# Altium PCB BB-ADC.PcbDoc
Units mm, origin at the board's own origin, x right, y up, seen from the top; angles counter-clockwise.
Board outline 35.05 x 55.12 mm, 2 copper layers (Top Layer, Bottom Layer); 11 components, 13 nets, 110 pads, 3 vias.
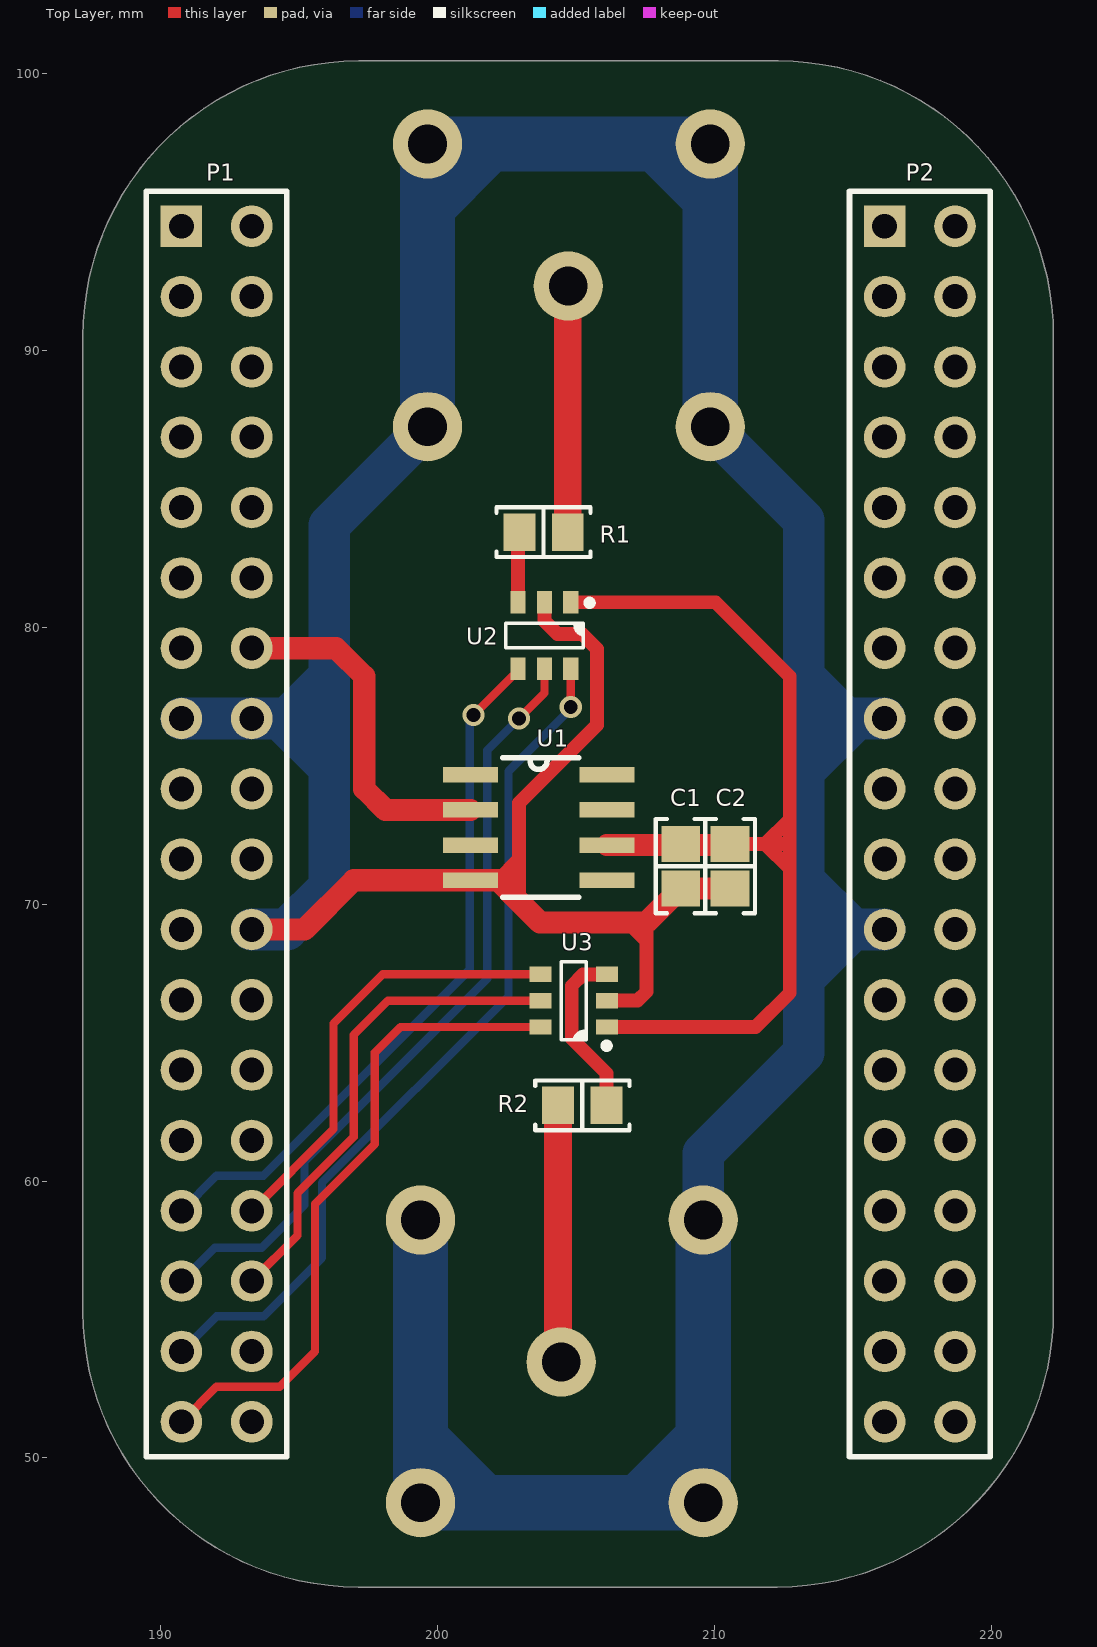
[diagram p0: Top Layer view]
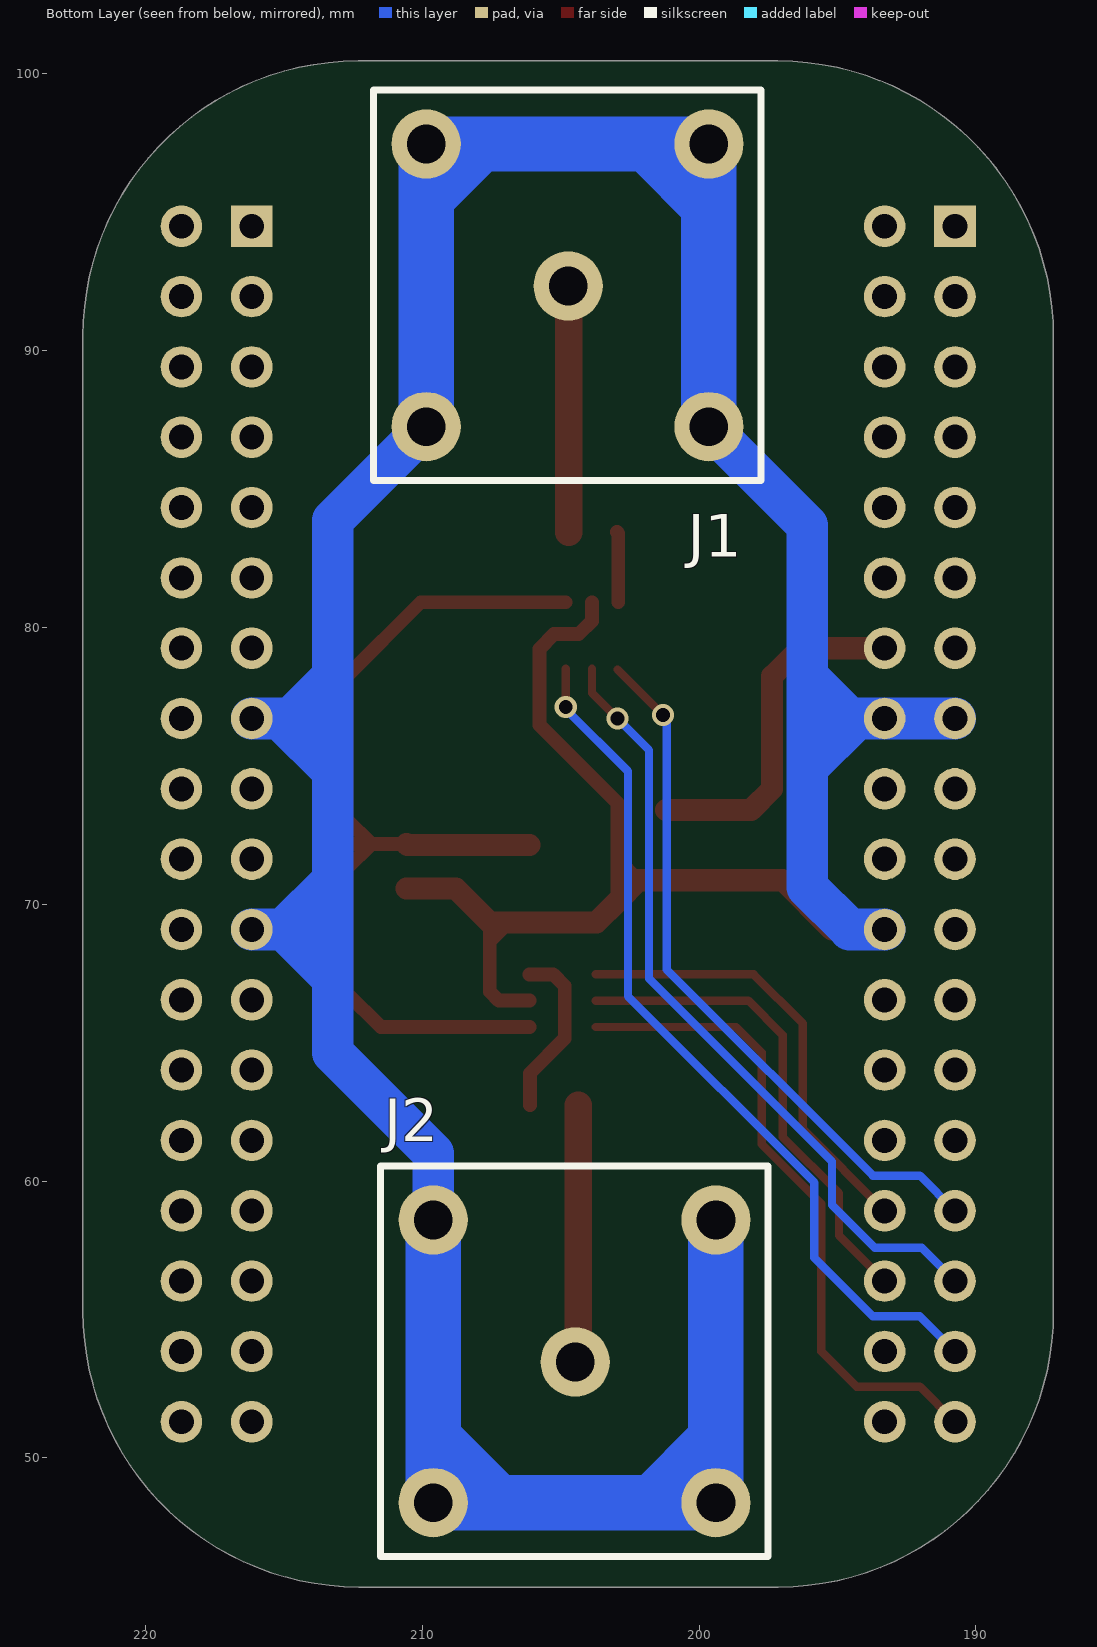
[diagram p1: Bottom Layer view, seen from below]
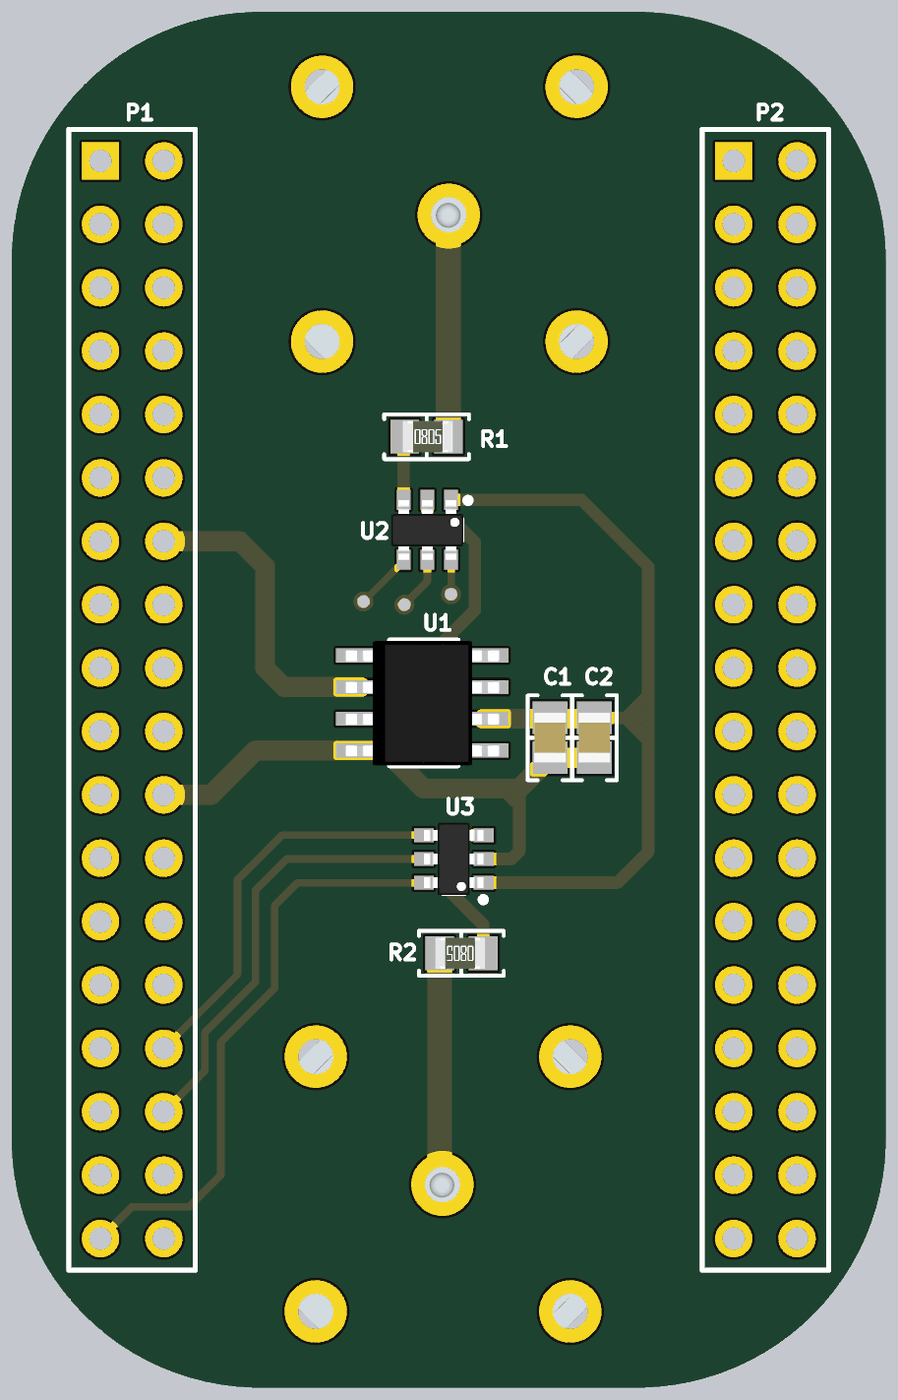
[diagram p2: 3D render of the assembled board from above, using the file's embedded part models]

## Layer stack, top to bottom
Top Solder: solder mask 0.0102, Solder Resist, Dk 3.5
Top Layer: signal copper 0.0356
Dielectric 1: dielectric 0.32, FR-4, Dk 4.8
Bottom Layer: signal copper 0.0356
Bottom Solder: solder mask 0.0102, Solder Resist, Dk 3.5

## Board outline
187.198,55.277 187.198,90.5 cw(c197.155,90.5) 197.155,100.457 212.312,100.457 cw(c212.312,90.519) 222.25,90.519 222.25,55.308 cw(c212.281,55.308) 212.281,45.339 197.136,45.339 cw(c197.136,55.277)

## Design rules (kind name [scope] priority, off if disabled: settings)
Clearance [All] p1: gap=0.3 ignorepadtopadclearanceinfootprint=TRUE
PolygonConnect [All] p1: connectstyle=Relief reliefconductorwidth=0.254 reliefentries=4 polygonreliefangle="90 Angle" airgapwidth=0.254
RoutingVias [All] p1: holewidth=0.5 width=0.8 viastyle="Through Hole" minholewidth=0.2 minwidth=0.3 maxholewidth=1 maxwidth=1.5
SolderMaskExpansion [All] p1: expansion=0.102
Width [All] p1: maxlimit=5 minlimit=0.1 preferedwidth=0.5
30 further rules are at their usual default settings.

## Components (designator, comment, footprint, x,y, rotation, side; value= is the part's Value field where it differs from the comment)
C1 "1uF" "CAP 0805/2012" 208.788,71.374 r90 top
C2 "1nF" "CAP 0805/2012" 210.566,71.374 r90 top
J1 "BNC" "BNC Straight" 209.854,97.459 r180 bottom
J2 "BNC" "BNC Straight" 209.6,58.597 r180 bottom
P1 "Beagle-Pocket" HDR2X18 190.754,94.488 r270 top
P2 "Beagle-Pocket" HDR2X18 216.154,94.488 r270 top
R1 "100" "RES 0805/2012" 203.835,83.439 r0 top
R2 "100" "RES 0805/2012" 205.232,62.738 r180 top
U1 "REF5030" "SOIC-8 (150mil-3.9mm width)" 200.193,73.331 r0 top
U2 "ADS7883" SOT-23-6 203.835,79.756 r270 top
U3 "ADS7883" SOT-23-6 204.978,66.548 r180 top

## Footprints (in the part's own frame and the unit in brackets; to place one, negate y for a bottom-side part, rotate by r counter-clockwise, add the part's x,y. Pads: shape width x height; smd on the part's side, far side on the other; paste and mask are expansions set on the pad)
"BNC Straight" [mm]
  round 2.5 hole 1.4: 1(5.13,-5.13) 2(0,-10.21) 2(0,0) 2(10.21,-10.21) 2(10.21,0)
  silkscreen extent -1.9,-12.15 12.1,1.95, body extent -0.85,-11.15 11.15,0.85, height 22.75
"CAP 0805/2012" [mm] "Chip Capacitor, 2-Leads, Body 2.00x1.20mm, IPC Medium Density"
  rect 1.3x1.4 smd: 1(-0.8,0) 2(0.8,0)
  silkscreen extent -1.7,-0.9 1.7,0.9, body extent -1,-0.64 1,0.64, height 1.26
HDR2X18 [mm] "Connector; Header; 18x2 Position"
  rect 1.5x1.5 hole 0.9: 1(0,0)
  round 1.5 hole 0.9: 2(0,2.54) 3(2.54,0) 4(2.54,2.54) 5(5.08,0) 6(5.08,2.54) 7(7.62,0) 8(7.62,2.54) 9(10.16,0) 10(10.16,2.54) 11(12.7,0) 12(12.7,2.54) 13(15.24,0) 14(15.24,2.54) 15(17.78,0) 16(17.78,2.54) 17(20.32,0) 18(20.32,2.54) 19(22.86,0) 20(22.86,2.54) 21(25.4,0) 22(25.4,2.54) 23(27.94,0) 24(27.94,2.54) 25(30.48,0) 26(30.48,2.54) 27(33.02,0) 28(33.02,2.54) 29(35.56,0) 30(35.56,2.54) 31(38.1,0) 32(38.1,2.54) 33(40.64,0) 34(40.64,2.54) 35(43.18,0) 36(43.18,2.54)
  silkscreen extent -1.27,-1.27 44.45,3.81
"RES 0805/2012" [mm] "Chip Resistor, 2-Leads, Body 2.00x1.25mm, IPC Medium Density"
  rect 1.15x1.35 smd: 1(-0.875,0) 2(0.875,0)
  silkscreen extent -1.7,-0.9 1.7,0.9, body extent -0.95,-0.62 1.05,0.63, height 0.6
"SOIC-8 (150mil-3.9mm width)" [mil]
  rect 78x22 smd: 1(39.37,52.95) 2(39.37,2.95) 3(39.37,-47.05) 4(39.37,-97.05) 5(233.37,-97.05) 6(233.37,-47.05) 7(233.37,2.95) 8(233.37,52.95)
  silkscreen extent 85,-121 193,77, body extent 15,-121 258,76, height 79
SOT-23-6 [mm]
  rect 0.8x0.55 smd: 1(-1.15,0.98) 2(-1.15,0.03) 3(-1.15,-0.92) 4(1.25,-0.92) 5(1.25,0.03) 6(1.25,0.98)
  silkscreen extent -1.23,-1.37 0.5,1.76, body extent -1.14,-1.42 1.25,1.48, height 1

## Part data
C1 C2: library part "CAP 0805/2012"
J1 J2: "RF Connectors / Coaxial Connectors BNC"
P1 P2: library part "Header 18X2", "Header, 18-Pin, Dual row", LatestRevisionDate=17-Jul-2002, LatestRevisionNote="Re-released for DXP Platform.", Publisher="Altium Limited"
R1 R2: library part "RES 0805/2012 ( 1/8W )"
U1: "Series Voltage Reference IC ±0.1% 10mA"
U2 U3: "12 Bit Analog to Digital Converter 1 Input 1 SAR SOT-23-6"

## Via types
v1: diameter 0.8, hole 0.5, Top Layer to Bottom Layer, tented both sides, 3 vias

## Nets (pads, with @x,y where several pads share a name; then routed paths per layer and width w, separated by ;. In a path a pad name is that pad's centre, name@x,y a point inside that pad or via, vN(x,y) a via of type N, cw(c..) or ccw(c..) an arc to the next point about the centre after c; other vN are vias at no path point)
3.3V: P1.14 U1.2 | length 12.7
  Top Layer w0.8: P1.14 196.342,79.248 197.358,78.232 197.358,74.168 198.12,73.406 U1.2
3V: C1.2 C2.2 U1.6 U2.1 U3.1 | length 37.2
  Top Layer w0.5: U2.1 210.051,80.906 212.725,78.232 212.725,73.063 ; U3.1 211.491,65.568 212.725,66.802 212.725,71.285 ; C2.2 211.836,72.174 ; 212.725,73.533 212.725,73.063 ; 211.836,72.174 212.725,71.285 ; 211.836,72.174 212.636,72.174 212.725,72.263 ; 211.836,72.174 212.725,73.063 ; 212.725,71.285 212.725,72.263 ; 212.725,72.263 212.725,73.063
  Top Layer w0.8: U1.6 210.528,72.136 C2.2
CS1: P1.29 U2.4 | length 25.6
  Top Layer w0.3: v1(201.306,76.835) U2.4@202.946,78.475
  Bottom Layer w0.3: P1.29 192.024,60.198 193.721,60.198 201.168,67.645 201.168,76.697 v1(201.306,76.835)
CS2: P1.30 U3.4 | length 16.2
  Top Layer w0.3: P1.30 196.25,61.884 196.25,65.694 198.024,67.468 U3.4
GND: C1.1 C2.1 J1.2 J2.2 P1.15 P1.16 P1.22 P2.15 P2.21 U1.4 U2.2 U3.2 | length 187.8
  Top Layer w0.5: 202.184,70.866 202.946,71.628 ; 202.692,70.993 202.946,70.739 ; 202.946,70.104 202.946,70.739 ; U2.2 203.865,80.234 204.343,79.756 205.232,79.756 205.765,79.223 205.765,76.479 202.946,73.66 202.946,71.628 ; U3.2 207.234,66.518 207.556,66.84 207.556,69.342 ; 206.883,69.342 207.518,68.707 ; 202.946,70.739 202.946,71.628
  Top Layer w0.8: P1.22 195.199,69.088 196.977,70.866 U1.4 202.184,70.866 202.946,70.104 203.708,69.342 206.883,69.342 207.556,69.342 C1.1 C2.1
  Bottom Layer w1.5: P1.15 P1.16 194.31,76.708 ; P1.22 194.564,69.088 196.088,70.612 196.088,74.93 ; J1.2@199.644,87.249 196.088,83.693 196.088,78.232 ; 199.644,94.869 202.057,97.282 202.057,97.459 ; J2.2@209.6,58.597 209.6,61.01 213.233,64.643 213.233,67.437 ; J1.2@209.854,87.249 213.233,83.87 213.233,78.232 ; P2.21 215.011,69.088 ; P2.15 215.138,76.708 ; 194.31,76.708 194.564,76.708 196.088,78.232 ; 194.31,76.708 196.088,74.93 ; 196.088,74.93 196.088,78.232 ; 213.233,67.437 213.233,70.866 ; 213.233,67.437 213.36,67.437 215.011,69.088 ; 213.233,70.866 213.233,74.803 ; 213.233,70.866 215.011,69.088 ; 213.233,74.803 213.233,78.232 ; 213.233,74.803 215.138,76.708 ; 213.233,78.232 214.757,76.708 215.138,76.708
  Bottom Layer w2: 199.39,51.562 199.39,50.673 ; J2.2@199.39,58.597 199.39,50.673 ; J1.2@199.644,87.249 199.644,94.869 199.644,97.459 202.057,97.459 207.899,97.459 ; J2.2@209.6,58.597 209.6,50.723 ; J1.2@209.854,87.249 209.854,95.504 ; 199.39,50.673 201.676,48.387 ; 199.39,50.673 199.39,48.387 201.676,48.387 ; 201.676,48.387 207.264,48.387 ; 207.264,48.387 209.6,48.387 209.6,50.723 ; 207.264,48.387 209.6,50.723 ; 207.899,97.459 209.854,97.459 209.854,95.504 ; 207.899,97.459 209.854,95.504
NetJ1_1: J1.1 R1.2 | length 8.9
  Top Layer w1: R1.2 J1.1@204.71,92.315
NetJ2_1: J2.1 R2.2 | length 9.3
  Top Layer w0.5: J2.1@204.357,53.58 J2.1
  Top Layer w1: J2.1@204.357,53.58 R2.2
NetR1_1: R1.1 U2.3 | length 2.6
  Top Layer w0.5: U2.3 202.915,83.394 R1.1
NetR2_1: R2.1 U3.3 | length 6.3
  Top Layer w0.5: R2.1 206.107,63.895 204.851,65.151 204.851,67.056 205.263,67.468 U3.3
SCLK1: P1.33 U2.6 | length 31.5
  Top Layer w0.3: v1(204.815,77.125) U2.6
  Bottom Layer w0.3: P1.33 192.024,55.118 193.721,55.118 195.834,57.231 195.834,59.944 202.565,66.675 202.565,74.803 204.815,77.053 v1(204.815,77.125)
SCLK2: P1.35 U3.6 | length 23.9
  Top Layer w0.3: P1.35 192.024,52.578 194.31,52.578 195.58,53.848 195.58,59.182 197.739,61.341 197.739,64.643 198.664,65.568 U3.6
SDO1: P1.31 U2.5 | length 28.5
  Top Layer w0.3: v1(202.946,76.708) 203.865,77.627 U2.5
  Bottom Layer w0.3: P1.31 191.954,57.588 193.651,57.588 195.199,59.136 195.199,60.706 201.803,67.31 201.803,75.565 v1(202.946,76.708)
SDO2: P1.32 U3.5 | length 17.7
  Top Layer w0.3: P1.32 194.945,58.039 194.945,59.563 196.977,61.595 196.977,65.278 198.217,66.518 U3.5
pads on no net: P1.1 P1.2 P1.3 P1.4 P1.5 P1.6 P1.7 P1.8 P1.9 P1.10 P1.11 P1.12 P1.13 P1.17 P1.18 P1.19 P1.20 P1.21 P1.23 P1.24 P1.25 P1.26 P1.27 P1.28 P1.34 P1.36 P2.1 P2.2 P2.3 P2.4 P2.5 P2.6 P2.7 P2.8 P2.9 P2.10 P2.11 P2.12 P2.13 P2.14 P2.16 P2.17 P2.18 P2.19 P2.20 P2.22 P2.23 P2.24 P2.25 P2.26 P2.27 P2.28 P2.29 P2.30 P2.31 P2.32 P2.33 P2.34 P2.35 P2.36 U1.1 U1.3 U1.5 U1.7 U1.8

## Silkscreen, mask and mechanical layers (free items; w line width, h text height)
BoardOutline:
  lines w0.254: 187.198,55.213 ccw(c197.072,55.213) 197.072,45.339 201.803,45.339 212.312,45.339 ccw(c212.312,55.277) 222.25,55.277 222.25,85.217 222.25,90.484 ccw(c212.277,90.484) 212.277,100.457 207.137,100.457 197.171,100.457 ccw(c197.171,90.484) 187.198,90.484 187.198,61.341 187.198,55.213